# Altium PCB FEV-60_Motor_Driver.PcbDoc
Units mil, origin at the board's own origin, x right, y up, seen from the top; angles counter-clockwise.
Board outline 4025 x 5275 mil, 2 copper layers (Top Layer, Bottom Layer); 92 components, 68 nets, 395 pads, 95 vias.
Unrouted connection lines stored in the file: 2.
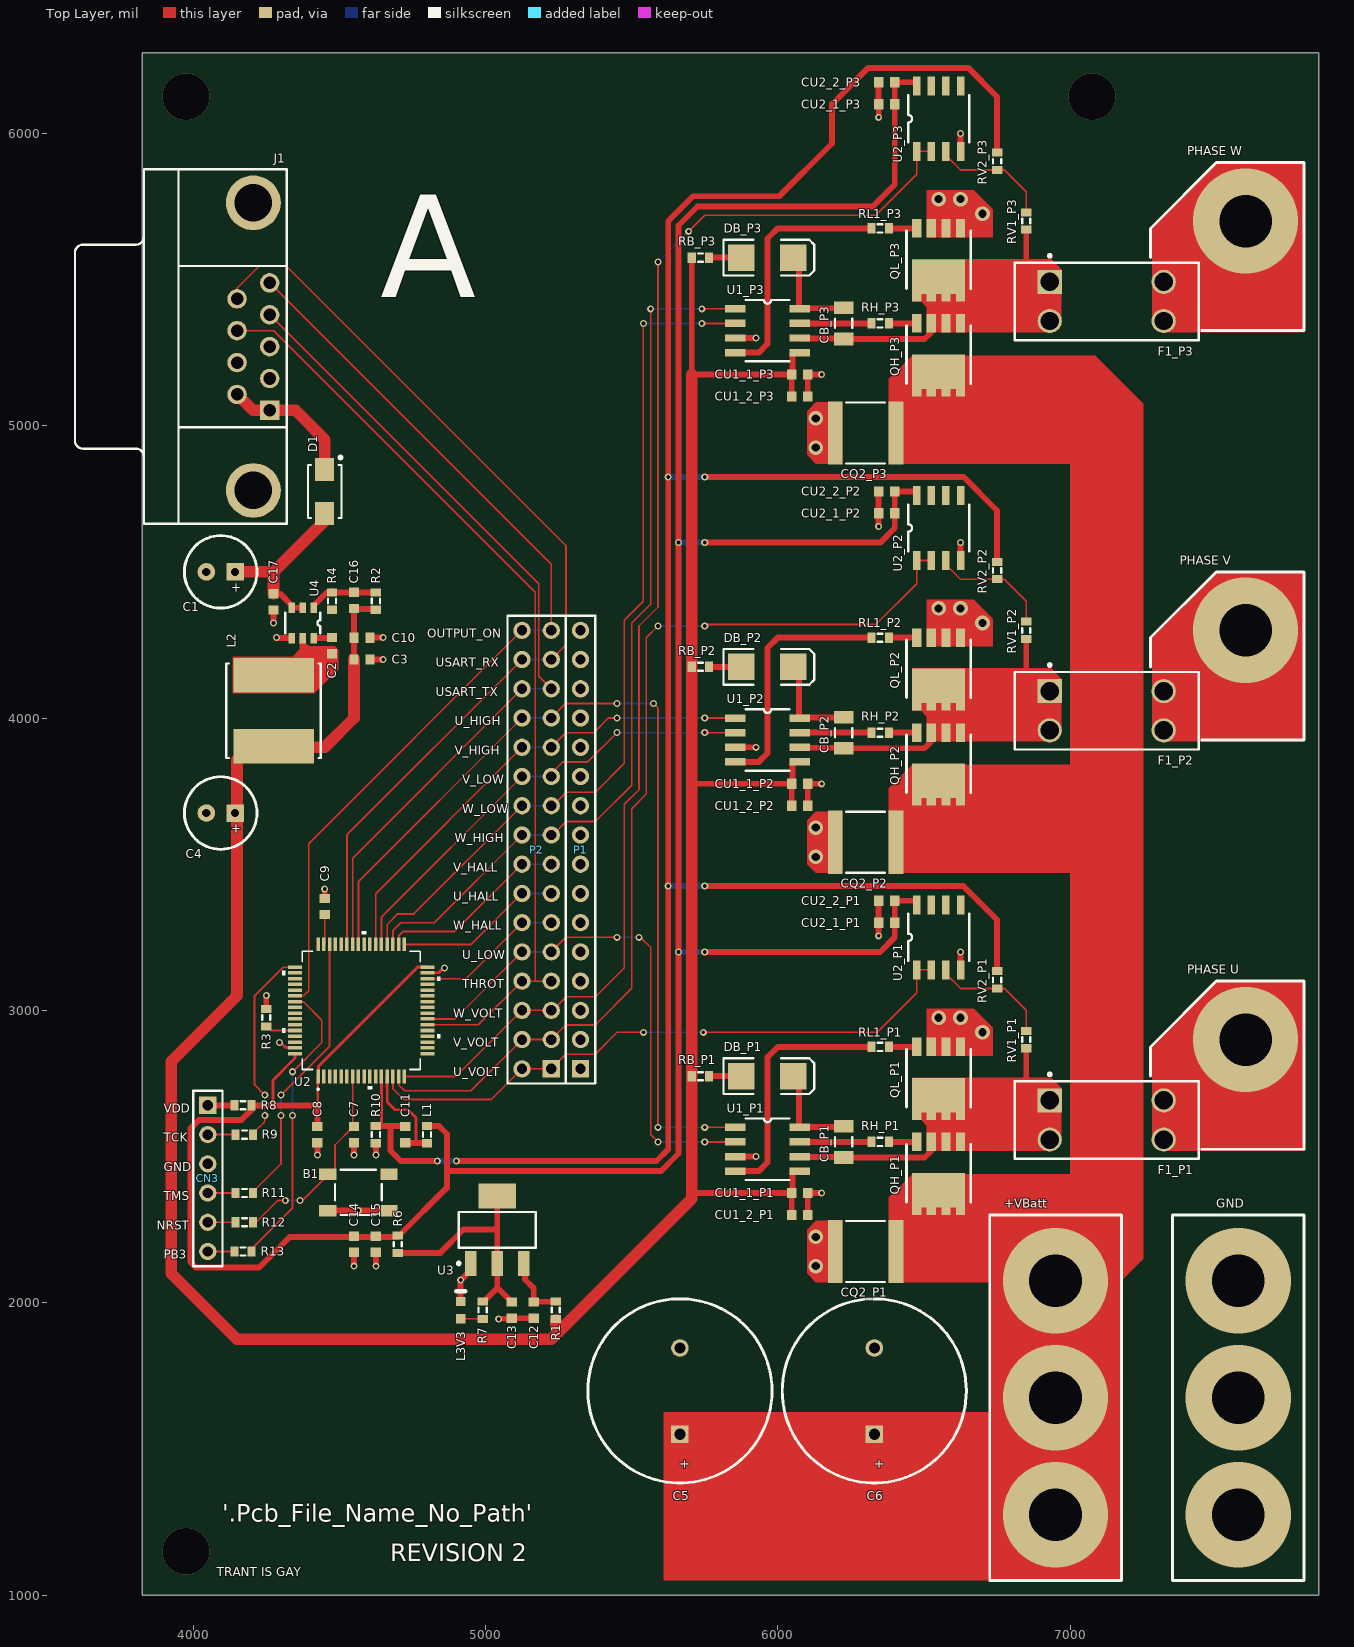
[diagram p0: Top Layer view]
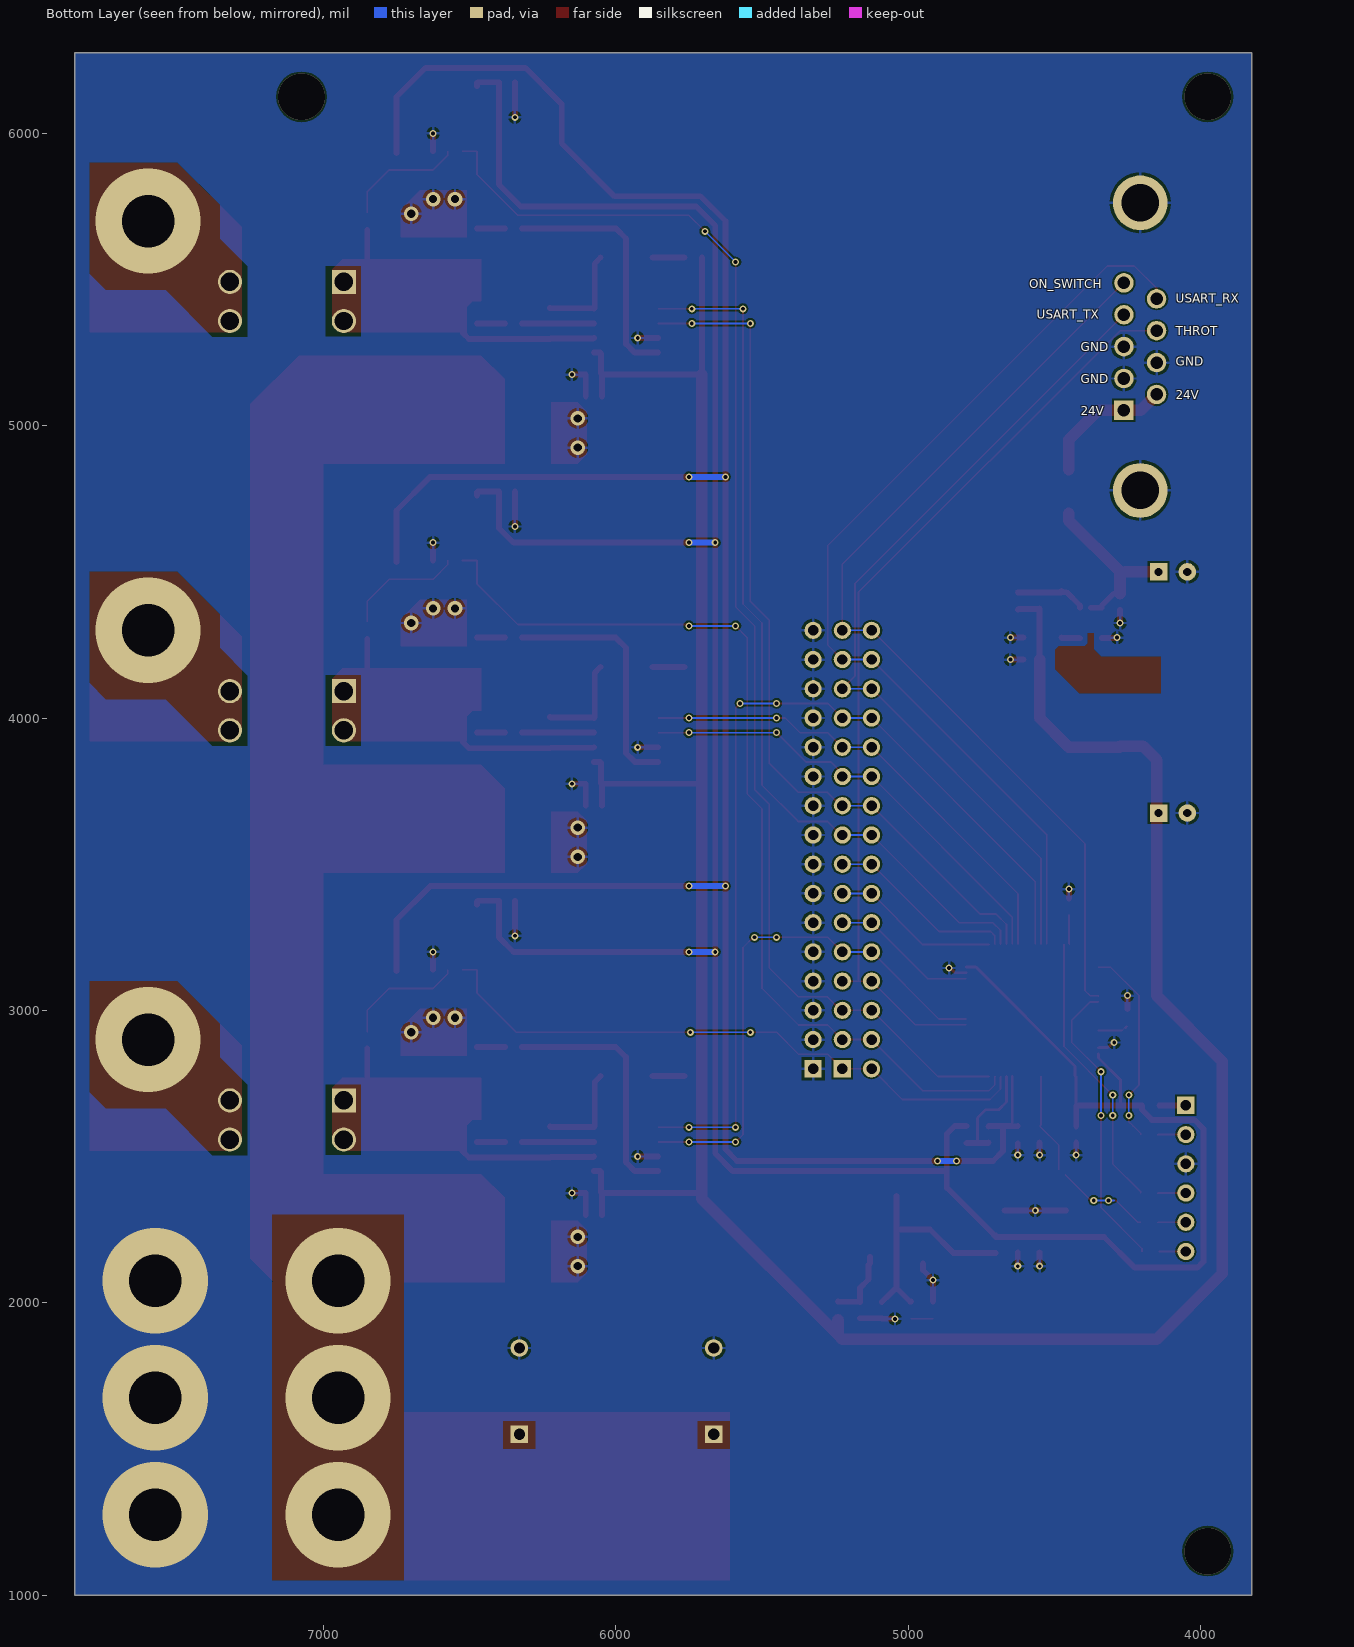
[diagram p1: Bottom Layer view, seen from below]

## Layer stack, top to bottom
Top Solder: solder mask 0.4, Solder Resist, Dk 3.5
Top Layer: signal copper 1.4
Dielectric 1: dielectric 12.6, FR-4, Dk 4.8
Bottom Layer: signal copper 1.4
Bottom Solder: solder mask 0.4, Solder Resist, Dk 3.5

## Board outline
3825,1000 7850,1000 7850,6275 3825,6275

## Design rules (kind name [scope] priority, off if disabled: settings)
Clearance Clearance_2 [All] p1: gap=6 ignorepadtopadclearanceinfootprint=FALSE
Clearance Clearance_1 [InNamedPolygon('Bottom Layer-GND')] p2: gap=10 ignorepadtopadclearanceinfootprint=FALSE except(0: Arc-Hole Track-Hole SMDPad-Hole THPad-Hole Via-Hole Fill-Hole Poly-Hole Region-Hole Text-Hole; 20: Via-Fill Via-Poly Via-Region)
Clearance [InNet('120V') vs InNet('GND')] p3: gap=6 ignorepadtopadclearanceinfootprint=FALSE except(200: Via-Poly)
ComponentClearance [All] p1: gap=6 collisioncheckmode=3 verticalgap=10 showdistances=FALSE
PlaneClearance PlaneClearance_1 [All] p1: clearance=20
PolygonConnect PolygonConnect_3 [All vs IsNamedPolygon('Bottom Layer-GND')] p1: connectstyle=Relief reliefconductorwidth=10 reliefentries=4 polygonreliefangle="90 Angle" airgapwidth=10
PolygonConnect PolygonConnect_2 [All vs IsNamedPolygon('Bottom Layer-GND')] p2: connectstyle=Relief reliefconductorwidth=25 reliefentries=4 polygonreliefangle="90 Angle" airgapwidth=10
PolygonConnect [All] p3: connectstyle=Relief reliefconductorwidth=10 reliefentries=4 polygonreliefangle="90 Angle" airgapwidth=10
RoutingVias [All] p1: holewidth=13 width=24 viastyle="Through Hole" minholewidth=13 minwidth=24 maxholewidth=28 maxwidth=50
SilkToSilkClearance [All] p1: silktosilkclearance=3
SilkToSolderMaskClearance [IsPad] p1: minsilkscreentomaskgap=5 clearancetoexposedcopper=TRUE
SolderMaskExpansion [All] p1: expansion=4
Width [All] p1: maxlimit=100 minlimit=6 preferedwidth=6
26 further rules are at their usual default settings.

## Classes and differential pairs
net class R4_Nets: FB GND
net class R2_Nets: 12V FB
net class L2_Nets: 12V NetC2_1
net class J1_Nets: 24V GND ON_SWITCH THROTTLE USART_RX USART_TX
net class C16_Nets: 12V FB
net class C10_Nets: 12V GND
net class C2_Nets: NetC2_1 NetC2_2
net class P1_Nets: GND
net class U2_Nets: AGND AVDD BOOT0 GND HALL1 HALL2 HALL3 HIN1 HIN2 HIN3 LIN1 LIN2 LIN3 NRST ON_SWITCH PB3 PF6 TCK THROTTLE TMS USART_RX USART_TX V_SENSE1 V_SENSE2 V_SENSE3 VDD
net class D1_Nets: 24V NetC1_1
net class C4_Nets: 12V GND
net class C3_Nets: 12V GND
net class C17_Nets: GND NetC1_1
net class C1_Nets: GND NetC1_1
net class U4_Nets: FB GND NetC1_1 NetC2_1 NetC2_2
net class R1_Nets: 12V NetC12_2
net class L3V3_Nets: GND NetL3V3_1
net class RV2_P3_Nets: AGND NetRV1_P3_1
net class RV2_P2_Nets: AGND NetRV1_P2_1
net class RV2_P1_Nets: AGND NetRV1_P1_1
net class RV1_P3_Nets: NetCB_P3_1 NetRV1_P3_1
net class RV1_P2_Nets: NetCB_P2_1 NetRV1_P2_1
net class RV1_P1_Nets: NetCB_P1_1 NetRV1_P1_1
net class RL1_P3_Nets: LO_P3 NetQL_P3_2
net class RL1_P2_Nets: LO_P2 NetQL_P2_2
net class RL1_P1_Nets: LO_P1 NetQL_P1_2
net class RH_P3_Nets: HO_P3 NetQH_P3_2
net class RH_P2_Nets: HO_P2 NetQH_P2_2
net class RH_P1_Nets: HO_P1 NetQH_P1_2
net class RB_P3_Nets: 12V NetDB_P3_1
net class RB_P2_Nets: 12V NetDB_P2_1
net class RB_P1_Nets: 12V NetDB_P1_1
net class QL_P3_Nets: GND NetCB_P3_1 NetQL_P3_2
net class QL_P2_Nets: GND NetCB_P2_1 NetQL_P2_2
net class QL_P1_Nets: GND NetCB_P1_1 NetQL_P1_2
net class QH_P3_Nets: 120V NetCB_P3_1 NetQH_P3_2
net class QH_P2_Nets: 120V NetCB_P2_1 NetQH_P2_2
net class QH_P1_Nets: 120V NetCB_P1_1 NetQH_P1_2
net class DB_P3_Nets: NetCB_P3_2 NetDB_P3_1
net class DB_P2_Nets: NetCB_P2_2 NetDB_P2_1
net class DB_P1_Nets: NetCB_P1_2 NetDB_P1_1
net class CU2_2_P3_Nets: GND VDD
net class CU2_1_P3_Nets: GND VDD
net class CU2_1_P2_Nets: GND VDD
net class CU2_1_P1_Nets: GND VDD
net class CU1_2_P3_Nets: 12V GND
net class CU1_2_P2_Nets: 12V GND
net class CU1_2_P1_Nets: 12V GND
net class CU1_1_P2_Nets: 12V GND
net class CU1_1_P1_Nets: 12V GND
net class CQ2_P3_Nets: 120V GND
net class CQ2_P2_Nets: 120V GND
net class C5_Nets: 120V GND
net class C6_Nets: 120V GND
net class CB_P3_Nets: NetCB_P3_1 NetCB_P3_2
net class CB_P2_Nets: NetCB_P2_1 NetCB_P2_2
net class CB_P1_Nets: NetCB_P1_1 NetCB_P1_2
net class V_SENSE[3..1]: V_SENSE1 V_SENSE2 V_SENSE3
net class U3_Nets: 3V3 GND NetC12_2
net class U2_P3_Nets: GND NetRV1_P3_1 V_SENSE3 VDD
net class U2_P2_Nets: GND NetRV1_P2_1 V_SENSE2 VDD
net class U2_P1_Nets: GND NetRV1_P1_1 V_SENSE1 VDD
net class R13_Nets: NetCN3_6 PB3
net class R12_Nets: NetCN3_5 NRST
net class R11_Nets: NetCN3_4 TMS
net class R10_Nets: AGND GND
net class R9_Nets: NetCN3_2 TCK
net class R8_Nets: NetCN3_1 VDD
net class R7_Nets: 3V3 NetL3V3_1
net class R6_Nets: 3V3 VDD
net class R3_Nets: BOOT0 GND
net class L1_Nets: AVDD VDD
net class F1_P3_Nets: NetCB_P3_1 NetF1_P3_3
net class F1_P2_Nets: NetCB_P2_1 NetF1_P2_3
net class F1_P1_Nets: NetCB_P1_1 NetF1_P1_3
net class CN3_Nets: GND NetCN3_1 NetCN3_2 NetCN3_4 NetCN3_5 NetCN3_6
net class C15_Nets: GND VDD
net class C14_Nets: GND VDD
net class C13_Nets: 3V3 GND
net class C12_Nets: GND NetC12_2
net class C11_Nets: AGND AVDD
net class C9_Nets: GND PF6
net class C8_Nets: GND VDD
net class C7_Nets: GND NRST
net class CU2_2_P2_Nets: GND VDD
net class CU2_2_P1_Nets: GND VDD
net class B1_Nets: GND NRST
component class U_FEV-60_Motor_Driver_Mcu: B1 C1 C2 C3 C4 C5 C6 C7 C8 C9 C10 C11 C12 C13 C14 C15 C16 C17 CN3 D1 J1 L1 L2 L3V3 P1 P2 R1 R2 R3 R4 R6 R7 R8 R9 R10 R11 R12 R13 U2 U3 U4
net class LIN[3..1]: LIN1 LIN2 LIN3
net class HIN[3..1]: HIN1 HIN2 HIN3
net class P2_Nets: HALL1 HALL2 HALL3 HIN1 HIN2 HIN3 LIN1 LIN2 LIN3 NetCN2_1 NetCN2_2 NetCN2_6 NetCN2_7 NetCN2_8 NetCN2_9 NetCN2_10 NetCN2_12 NetCN2_14 NetCN2_15 NetCN2_17 NetCN2_18 NetCN2_22 NetCN2_24 NetCN2_25 NetCN2_26 NetCN2_27 NetCN2_29 NetCN2_31 NetCN2_32 NetCN2_34 NetCN2_36 NetCN2_38 ON_SWITCH THROTTLE USART_RX USART_TX V_SENSE1 V_SENSE2 V_SENSE3
net class U1_P3_Nets: 12V GND HIN3 HO_P3 LIN3 LO_P3 NetCB_P3_1 NetCB_P3_2
net class U1_P2_Nets: 12V GND HIN2 HO_P2 LIN2 LO_P2 NetCB_P2_1 NetCB_P2_2
net class U1_P1_Nets: 12V GND HIN1 HO_P1 LIN1 LO_P1 NetCB_P1_1 NetCB_P1_2
net class CQ2_P1_Nets: 120V GND
net class CU1_1_P3_Nets: 12V GND
component class P3: CB_P3 CQ2_P3 CU1_1_P3 CU1_2_P3 CU2_1_P3 CU2_2_P3 DB_P3 F1_P3 QH_P3 QL_P3 RB_P3 RH_P3 RL1_P3 RV1_P3 RV2_P3 U1_P3 U2_P3
component class P2: CB_P2 CQ2_P2 CU1_1_P2 CU1_2_P2 CU2_1_P2 CU2_2_P2 DB_P2 F1_P2 QH_P2 QL_P2 RB_P2 RH_P2 RL1_P2 RV1_P2 RV2_P2 U1_P2 U2_P2
component class P1: CB_P1 CQ2_P1 CU1_1_P1 CU1_2_P1 CU2_1_P1 CU2_2_P1 DB_P1 F1_P1 QH_P1 QL_P1 RB_P1 RH_P1 RL1_P1 RV1_P1 RV2_P1 U1_P1 U2_P1
channel class FEV-60_Motor_Driver_Phase1: PHASE1 PHASE2 PHASE3

## Components (designator, comment, footprint, x,y, rotation, side; value= is the part's Value field where it differs from the comment)
B1 "Button" "Button - duplicate" 4670,2315 r180 top
C1 "UVY1V101MED1TD" UVY1V101MED1TD 4125,4500 r180 top value=100uF
C2 "Cap Semi" 1608[0603] 4475,4247.44 r90 top value=100nF
C3 "Cap Semi" 1608[0603] 4577.56,4200 r180 top value=10uF
C4 "UVY1V101MED1TD" UVY1V101MED1TD 4125,3675 r180 top value=100uF
C5 "UCS2D151MHD1TN" UCS2D151MHD1TN 5835,1700 r90 top value=100pF
C6 "UCS2D151MHD1TN" UCS2D151MHD1TN 6500,1700 r90 top value=100pF
C7 "Cap Semi" 1608[0603] 4550,2575 r90 top value=100nF
C8 "Cap Semi" 1608[0603] 4425,2575 r90 top value=22uF
C9 "Cap Semi" 1608[0603] 4450,3355 r270 top value=2.2uF
C10 "Cap Semi" 1608[0603] 4577.56,4275 r180 top value=10uF
C11 "Cap Semi" 1608[0603] 4725,2575 r270 top value=10uF
C12 "Cap Semi" 1608[0603] 5165,1974.45 r90 top value=10uF
C13 "Cap Semi" 1608[0603] 5090,1974.45 r90 top value=10uF
C14 "Cap Semi" 1608[0603] 4550,2200 r90 top value=22uF
C15 "Cap Semi" 1608[0603] 4625,2200 r90 top value=22uF
C16 "Cap Semi" 1608[0603] 4550,4402.56 r270 top value=12pF
C17 "Cap Semi" 1608[0603] 4275,4397.44 r90 top value=10uF
CB_P1 "Cap Semi" C1206 6225,2550 r90 top value=10uF (schematic designator CB)
CB_P2 "Cap Semi" C1206 6225,3950 r90 top value=10uF (schematic designator CB)
CB_P3 "Cap Semi" C1206 6225,5350 r90 top value=10uF (schematic designator CB)
CN3 "Header 6X1" HDR1X6 4050,2675 r270 top
CQ2_P1 "1uF" TDK-C5750-2_M 6300,2175 r180 top (schematic designator CQ2)
CQ2_P2 "1uF" TDK-C5750-2_M 6300,3575 r180 top (schematic designator CQ2)
CQ2_P3 "1uF" TDK-C5750-2_M 6300,4975 r180 top (schematic designator CQ2)
CU1_1_P1 "Cap Semi" 1608[0603] 6075,2375 r0 top value=10uF (schematic designator CU1_1)
CU1_1_P2 "Cap Semi" 1608[0603] 6075,3775 r0 top value=10uF (schematic designator CU1_1)
CU1_1_P3 "Cap Semi" 1608[0603] 6075,5175 r0 top value=10uF (schematic designator CU1_1)
CU1_2_P1 "Cap Semi" 1608[0603] 6075,2300 r0 top value=10uF (schematic designator CU1_2)
CU1_2_P2 "Cap Semi" 1608[0603] 6075,3700 r0 top value=10uF (schematic designator CU1_2)
CU1_2_P3 "Cap Semi" 1608[0603] 6075,5100 r0 top value=10uF (schematic designator CU1_2)
CU2_1_P1 "Cap Semi" 1608[0603] 6372.44,3300 r180 top value=10uF (schematic designator CU2_1)
CU2_1_P2 "Cap Semi" 1608[0603] 6372.44,4700 r180 top value=10uF (schematic designator CU2_1)
CU2_1_P3 "Cap Semi" 1608[0603] 6372.44,6100 r180 top value=10uF (schematic designator CU2_1)
CU2_2_P1 "Cap Semi" 1608[0603] 6372.44,3375 r180 top value=10uF (schematic designator CU2_2)
CU2_2_P2 "Cap Semi" 1608[0603] 6372.44,4775 r180 top value=10uF (schematic designator CU2_2)
CU2_2_P3 "Cap Semi" 1608[0603] 6372.44,6175 r180 top value=10uF (schematic designator CU2_2)
D1 "STPS2L30A" STPS2L30A 4450,4775 r270 top
DB_P1 "STPS2200U" SMB 5963.58,2775 r0 top (schematic designator DB)
DB_P2 "STPS2200U" SMB 5963.58,4175 r0 top (schematic designator DB)
DB_P3 "STPS2200U" SMB 5963.58,5575 r0 top (schematic designator DB)
F1_P1 "3568" KSTN-3568_V 7125,2625 r0 top (schematic designator F1)
F1_P2 "3568" KSTN-3568_V 7125,4025 r0 top (schematic designator F1)
F1_P3 "3568" KSTN-3568_V 7125,5425 r0 top (schematic designator F1)
J1 "D Connector 9" DSUB1.385-2H9 3831.89,5270.47 r90 top locked
L1 "Ferrite" J1-0603 4800,2575 r270 top
L2 "Inductor" 74404084100 4275,4025 r270 top value=6.8uH
L3V3 "HSMS-C190" AVAG-HSMX-C190_V 4915,1974.45 r90 top
P1 "Header 16" HDR1X16 5325,2800 r90 top locked
P2 "Header 16X2" HDR2X16 5225,2800 r90 top locked
QH_P1 "TPH2900ENH" TPH2900ENH 6625,2555 r270 top (schematic designator QH)
QH_P2 "TPH2900ENH" TPH2900ENH 6625,3955 r270 top (schematic designator QH)
QH_P3 "TPH2900ENH" TPH2900ENH 6625,5355 r270 top (schematic designator QH)
QL_P1 "TPH2900ENH" TPH2900ENH 6625,2880 r270 top (schematic designator QL)
QL_P2 "TPH2900ENH" TPH2900ENH 6625,4280 r270 top (schematic designator QL)
QL_P3 "TPH2900ENH" TPH2900ENH 6625,5680 r270 top (schematic designator QL)
R1 "Res3" J1-0603 5240,1974.45 r270 top value=0
R2 "Res3" J1-0603 4625,4400 r90 top value=422K
R3 "Res3" J1-0603 4250,2975 r270 top value=10K
R4 "Res3" J1-0603 4475,4400 r270 top value=30.1K
R6 "Res3" J1-0603 4700,2200 r270 top value=0
R7 "Res3" J1-0603 4990,1974.45 r90 top value=1K
R8 "Res3" J1-0603 4170.47,2675 r0 top value=0
R9 "Res3" J1-0603 4175,2575 r0 top value=22
R10 "Res3" J1-0603 4625,2575 r90 top value=0
R11 "Res3" J1-0603 4175,2375 r0 top value=22
R12 "Res3" J1-0603 4175,2275 r0 top value=22
R13 "Res3" J1-0603 4170.47,2175 r0 top value=22
RB_P1 "Res3" J1-0603 5735,2775 r0 top value=5 (schematic designator RB)
RB_P2 "Res3" J1-0603 5735,4175 r0 top value=5 (schematic designator RB)
RB_P3 "Res3" J1-0603 5735,5575 r0 top value=5 (schematic designator RB)
RH_P1 "Res3" J1-0603 6350,2550 r0 top value=5 (schematic designator RH)
RH_P2 "Res3" J1-0603 6350,3950 r0 top value=5 (schematic designator RH)
RH_P3 "Res3" J1-0603 6350,5350 r0 top value=5 (schematic designator RH)
RL1_P1 "Res3" J1-0603 6350,2875 r0 top value=5 (schematic designator RL1)
RL1_P2 "Res3" J1-0603 6350,4275 r0 top value=5 (schematic designator RL1)
RL1_P3 "Res3" J1-0603 6350,5675 r0 top value=5 (schematic designator RL1)
RV1_P1 "Res3" J1-0603 6850,2900 r270 top value=1Meg (schematic designator RV1)
RV1_P2 "Res3" J1-0603 6850,4300 r270 top value=1Meg (schematic designator RV1)
RV1_P3 "Res3" J1-0603 6850,5700 r270 top value=1Meg (schematic designator RV1)
RV2_P1 "Res3" J1-0603 6750,3104.53 r270 top value=22K (schematic designator RV2)
RV2_P2 "Res3" J1-0603 6750,4504.53 r270 top value=22K (schematic designator RV2)
RV2_P3 "Res3" J1-0603 6750,5904.53 r270 top value=22K (schematic designator RV2)
U1_P1 "FAN7191-F085" FAN7191-F085 5854.53,2600 r0 top (schematic designator U1)
U1_P2 "FAN7191-F085" FAN7191-F085 5854.53,4000 r0 top (schematic designator U1)
U1_P3 "FAN7191-F085" FAN7191-F085 5854.53,5400 r0 top (schematic designator U1)
U2 "MCU_LQFP64" "STM32F030R8 - duplicate" 4575,3000 r90 top
U2_P1 "TLV272IDR" D0008A_M 6550,3250 r90 top (schematic designator U2)
U2_P2 "TLV272IDR" D0008A_M 6550,4650 r90 top (schematic designator U2)
U2_P3 "TLV272IDR" D0008A_M 6550,6050 r90 top (schematic designator U2)
U3 "LD1117S33TR" "LD1117S33TR - duplicate" 5040,2249.45 r90 top
U4 "AP63301WU-7" AP63301WU-7 4375,4325 r270 top

## Footprints (in the part's own frame and the unit in brackets; to place one, negate y for a bottom-side part, rotate by r counter-clockwise, add the part's x,y. Pads: shape width x height; smd on the part's side, far side on the other; paste and mask are expansions set on the pad)
1608[0603] [mm] "Chip Capacitor, Body 1.6x0.8mm, IPC High Density"
  rect 0.8x0.9 smd: 1(-0.7,0) 2(0.7,0)
  body extent -0.87,-0.48 0.87,0.48, height 1.3
74404084100 [mm] "10µH Shielded Wirewound Inductor 3.3A 29mOhm Nonstandard"
  rect 3x7 smd: 1(-3.1,0) 2(3.1,0)
  silkscreen extent -4.1,-4.1 4.1,4.1, body extent -4.1,-4.1 4.1,4.1, height 4.2
AP63301WU-7 [mm] "Buck Switching Regulator IC Positive Adjustable 0.8V 1 Output 3A SOT-23-6 Thin, TSOT-23-6"
  rect 0.95x0.55 smd: 1(-1.325,0.95) 2(-1.325,0) 3(-1.325,-0.95) 4(1.325,-0.95) 5(1.325,0) 6(1.325,0.95)
  silkscreen extent -0.89,-1.52 0.89,1.52, body extent -1.4,-1.5 1.4,1.5, height 1.1
AVAG-HSMX-C190_V [mm] "SMD, 2-Leads, Body 1.6x0.8mm, Height 0.9mm"
  rect 0.8x0.8 smd: 1(-0.75,0) 2(0.75,0)
  silkscreen extent 1.65,-0.4 1.65,0.4, body extent -0.8,-0.4 0.8,0.4, height 0.9
"Button - duplicate" [mm]
  rect 1.5x1 smd: 1(0,0) 2(0,-3.175) 3(5.334,-3.175) 4(5.334,0)
  silkscreen extent 0.64,-3.56 4.7,0.38
C1206 [mm] "Chip Capacitor, Body 3.2x1.6mm, IPC High Density"
  rect 1.1x1.7 smd: 1(-1.35,0) 2(1.35,0)
  silkscreen extent -0.4,-0.75 0.4,0.75, body extent -1.7,-0.9 1.7,0.9, height 1.3
D0008A_M [mm] "SOIC, 8-Leads, Body 5x4mm, Pitch 1.27mm, IPC Low Density"
  rect 1.65x0.65 smd: 1(-2.825,1.905) 2(-2.825,0.635) 3(-2.825,-0.635) 4(-2.825,-1.905) 5(2.825,-1.905) 6(2.825,-0.635) 7(2.825,0.635) 8(2.825,1.905)
  silkscreen extent -2.03,-2.67 2.03,2.63, body extent -3,-2.45 3,2.45, height 1.63
DSUB1.385-2H9 [mm] "Connector; D Subminiature; 9 Position; Right Angle; Pitch 1.385 mm"
  rect 1.69x1.69 hole 1.09: 1(-5.54,-10.92)
  round 1.69 hole 1.09: 2(-2.77,-10.92) 3(0,-10.92) 4(2.77,-10.92) 5(5.54,-10.92) 6(-4.155,-8.08) 7(-1.385,-8.08) 8(1.385,-8.08) 9(4.155,-8.08)
  round 4.76 hole 3.26: 10(-12.495,-9.5) 11(12.495,-9.5)
  silkscreen extent -15.4,-12.4 15.4,6
FAN7191-F085 [mm]
  rect 1.75x0.65 smd: 1(0,0) 2(0,-1.27) 3(0,-2.54) 4(0,-3.81) 5(5.6,-3.81) 6(5.6,-2.54) 7(5.6,-1.27) 8(5.6,0)
  silkscreen extent 0.89,-4.57 4.7,0.76
HDR1X6 [mm] "Connector; Header; 6 Position"
  rect 1.5x1.5 hole 0.9: 1(0,0)
  round 1.5 hole 0.9: 2(2.54,0) 3(5.08,0) 4(7.62,0) 5(10.16,0) 6(12.7,0)
  silkscreen extent -1.27,-1.27 13.97,1.27
HDR1X16 [mm] "Connector; Header; 16 Position"
  rect 1.5x1.5 hole 0.9: 1(0,0)
  round 1.5 hole 0.9: 2(2.54,0) 3(5.08,0) 4(7.62,0) 5(10.16,0) 6(12.7,0) 7(15.24,0) 8(17.78,0) 9(20.32,0) 10(22.86,0) 11(25.4,0) 12(27.94,0) 13(30.48,0) 14(33.02,0) 15(35.56,0) 16(38.1,0)
  silkscreen extent -1.27,-1.27 39.37,1.27
HDR2X16 [mm] "Connector; Header; 16x2 Position"
  rect 1.5x1.5 hole 0.9: 1(0,0)
  round 1.5 hole 0.9: 2(0,2.54) 3(2.54,0) 4(2.54,2.54) 5(5.08,0) 6(5.08,2.54) 7(7.62,0) 8(7.62,2.54) 9(10.16,0) 10(10.16,2.54) 11(12.7,0) 12(12.7,2.54) 13(15.24,0) 14(15.24,2.54) 15(17.78,0) 16(17.78,2.54) 17(20.32,0) 18(20.32,2.54) 19(22.86,0) 20(22.86,2.54) 21(25.4,0) 22(25.4,2.54) 23(27.94,0) 24(27.94,2.54) 25(30.48,0) 26(30.48,2.54) 27(33.02,0) 28(33.02,2.54) 29(35.56,0) 30(35.56,2.54) 31(38.1,0) 32(38.1,2.54)
  silkscreen extent -1.27,-1.27 39.37,3.81
J1-0603 [mm] "Chip Resistor, Body 1.6x0.8mm, IPC High Density"
  rect 0.7x0.9 smd: 1(-0.75,0) 2(0.75,0)
  silkscreen extent -0.2,-0.35 0.2,0.35, body extent -0.85,-0.48 0.85,0.48, height 0.9
KSTN-3568_V [mm] "THD, 4-Leads, Body 16x6.73mm, Pitch 9.9mm"
  rect 2.1x2.1 hole 1.6: 1(-4.95,1.7)
  round 2.1 hole 1.6: 2(-4.95,-1.7) 3(4.95,1.7) 4(4.95,-1.7)
  silkscreen extent -8,-3.36 8,4.09, body extent -8,-3.37 8,3.37, height 7.44
"LD1117S33TR - duplicate" [mm] "SOT223, LDO 3.3V Converter"
  rect 2.15x1 smd: 1(-2.925,2.3) 2(-2.925,0) 3(-2.925,-2.3)
  rect 2.15x3.25 smd: 4(2.925,0)
  silkscreen extent -3.05,-3.35 1.55,3.47, body extent -3.5,-3.35 3.5,3.35, height 1.8
SMB [mm] "DO-214-AA/SMB; 2 C-Bend Leads; Body 5.3 x 3.6 mm, inc. leads (LxW)"
  rect 2.3x2.3 smd: 1(-2.25,0) 2(2.25,0)
  silkscreen extent -3.8,-1.55 4.1,1.55
"STM32F030R8 - duplicate" [mil]
  rect 47x12 smd: 1(-226.38,147.64) 2(-226.38,127.95) 3(-226.38,108.27) 4(-226.38,88.58) 5(-226.38,68.9) 6(-226.38,49.21) 7(-226.38,29.53) 8(-226.38,9.84) 9(-226.38,-9.84) 10(-226.38,-29.53) 11(-226.38,-49.21) 12(-226.38,-68.9) 13(-226.38,-88.58) 14(-226.38,-108.27) 15(-226.38,-127.95) 16(-226.38,-147.64) 33(226.38,-147.64) 34(226.38,-127.95) 35(226.38,-108.27) 36(226.38,-88.58) 37(226.38,-68.9) 38(226.38,-49.21) 39(226.38,-29.53) 40(226.38,-9.84) 41(226.38,9.84) 42(226.38,29.53) 43(226.38,49.21) 44(226.38,68.9) 45(226.38,88.58) 46(226.38,108.27) 47(226.38,127.95) 48(226.38,147.64)
  rect 12x47 smd: 17(-147.64,-226.38) 18(-127.95,-226.38) 19(-108.27,-226.38) 20(-88.58,-226.38) 21(-68.9,-226.38) 22(-49.21,-226.38) 23(-29.53,-226.38) 24(-9.84,-226.38) 25(9.84,-226.38) 26(29.53,-226.38) 27(49.21,-226.38) 28(68.9,-226.38) 29(88.58,-226.38) 30(108.27,-226.38) 31(127.95,-226.38) 32(147.64,-226.38) 49(147.64,226.38) 50(127.95,226.38) 51(108.27,226.38) 52(88.58,226.38) 53(68.9,226.38) 54(49.21,226.38) 55(29.53,226.38) 56(9.84,226.38) 57(-9.84,226.38) 58(-29.53,226.38) 59(-49.21,226.38) 60(-68.9,226.38) 61(-88.58,226.38) 62(-108.27,226.38) 63(-127.95,226.38) 64(-147.64,226.38)
  silkscreen extent -273,-270 270,270, body extent -236,-236 236,236, height 63
STPS2L30A [mm] "SODFL, Shottkey Diode"
  rect 2x1.65 smd: 1(-1.9,0) 2(1.9,0)
  silkscreen extent -3.07,-1.45 2.3,1.5, body extent -2.54,-1.45 2.54,1.45, height 2.45
TDK-C5750-2_M [mm] "SMD, 2-Leads, Body 6.1x5.4mm, IPC Low Density"
  rect 1.27x5.5 smd: 1(-2.644,0) 2(2.644,0)
  silkscreen extent -1.67,-2.65 1.67,2.65, body extent -3.05,-2.7 3.05,2.7, height 2.5
TPH2900ENH [mm]
  rect 3x4.61 smd: 1(4.318,-1.905)
  rect 1.6x0.8 smd: 1(5.673,-1.27) 1(5.673,0) 1(5.673,-3.81) 1(5.673,-2.54) 2(0.127,-3.81) 3(0.127,0) 3(0.127,-1.27) 3(0.127,-2.54)
  silkscreen extent 0.33,-4.7 5.33,0.89
UCS2D151MHD1TN [mil] "Radial Cap 50% Protection"
  rect 60x60 hole 38: 1(-150,170)
  round 60 hole 38: 2(145,170)
  silkscreen extent -316,-145 313,485
UVY1V101MED1TD [mil] "Radial Cap from Nichicon"
  rect 60x60 hole 28: 1(-18.43,0)
  round 60 hole 28: 2(80,0)
  silkscreen extent -93,-124 155,124

## Part data
C1 C4 C5 C6: "Polarized Capacitor (Axial)", LatestRevisionDate=17-Jul-2002, LatestRevisionNote="Re-released for DXP Platform.", PackageDescription="Polarized Capacitor; 2 Leads", PackageReference=POLAR0.8, Published=8-Jun-2000, Publisher="Altium Limited"
C2 C3 C7 C8 C9 C10 C11 C12 C13 C14 C15 C16 C17 CU1_1_P1 CU1_1_P2 CU1_1_P3 CU1_2_P1 CU1_2_P2 CU1_2_P3 CU2_1_P1 CU2_1_P2 CU2_1_P3 CU2_2_P1 CU2_2_P2 CU2_2_P3: "Capacitor (Semiconductor SIM Model)", LatestRevisionDate=29-May-2009, LatestRevisionNote="IPC-7351 Footprint Added.", PackageDescription="Chip Capacitor", PackageReference=C1206, Published=8-Jun-2000, Publisher="Altium Limited"
CB_P1 CB_P2 CB_P3: "Capacitor (Semiconductor SIM Model) at least 10-20uF", LatestRevisionDate=29-May-2009, LatestRevisionNote="IPC-7351 Footprint Added.", PackageDescription="Chip Capacitor", PackageReference=C1206, Published=8-Jun-2000, Publisher="Altium Limited"
CN3: "Header, 6-Pin, Single row", LatestRevisionDate=17-Jul-2002, LatestRevisionNote="Re-released for DXP Platform.", Publisher="Altium Limited"
CQ2_P1 CQ2_P2 CQ2_P3: library part C5750X7R2E105K230KA, "Chip Capacitor, 1 uF, +/- 20%, 250 V, -55 to 125 degC, 2220 (5750 Metric), RoHS, Tape and Reel", Capacitance=10µF, Manufacturer=TDK, Operating Temperature=-55°C~125°C, Package / Case=2220(5750Metric), Package Description="SMD, 2-Leads, Body 6.1 x 5.4 mm", Package Reference=C5750-2, PCN Part Number=MLCCPartNumberChange30/Nov/2012, Ratings=-, Standard Package=1, Temperature Coefficient=X7S, Tolerance=±20%, Voltage - Rated=100V, Applications=GeneralPurpose, Catalog Drawings=CSERIES_2220_2.5, Category=Capacitors, Datasheet URL=https://datasheet.ciiva.com/24216/c5750x7s2a106m230kb-265716-24216594.pdf, Datasheet Version=09/2013, Family=CeramicCapacitors, Featured Product=Compact,High-CapacitanceMultilayerCeramicChipCapacitorsMidVoltageX7S-100VMLCCsC-SeriesMidVoltageMLCCs, Features=-, Height - Seated (Max)=-, Kits=445-9009-KIT-ND-KITCAPCERHICAP100V-630VSMDSAMPLEKIT1008-ND-KITCAPCERMLCC100V-630V, Lead Spacing=-, Lead Style=-, Manufacturer URL=http://www.tdk.com/, Mounting Technology=SurfaceMount, Mounting Type=SurfaceMount,MLCC, Online Catalog=CSeries,MidVoltage, Other Names=445-5212-1, Packaging=CutTape(CT), Product Training Modules=SEAT,CCV,andTVCLDesignToolsCSeriesMidVoltageCapacitorsFamilyGuidetoReplacinganElectrolyticCapacitorwithanMLCC, RoHS Information=RoHSCertificate-MLCC, Series=C, Size / Dimension="0.224\"Lx0.197\"W(5.70mmx5.00mm)", Thickness (Max)="0.098\"(2.50mm)"
D1: Manuf_1=STM, Manuf_Part_1=BAT60JFILM, Distrib=ST, ECCN_US/EU=EAR99/NEC, Order=BAT60JFILM, Provided=ST, Revision="July-2002: Re-released for DXP Platform."
DB_P1 DB_P2 DB_P3: library part "D Schottky", "Schottky Diode", Code_JEDEC=DO-214-AA, LatestRevisionDate=17-Jul-2002, LatestRevisionNote="Re-released for DXP Platform.", PackageDescription="DO-214-AA/SMB; 2 C-Bend Leads; Body 5.3 x 3.6 mm, inc. leads (LxW)", PackageReference=SMB, Published=8-Jun-2000, Publisher="Altium Limited"
F1_P1 F1_P2 F1_P3: library part CMP-2000-05464-1, "Fuse Holder, 20 A, 500 V, -50 to 145 degC, 4-Pin THD, RoHS", Manufacturer=Keystone, Package Description="4-Pin Through Hole Device, Body 16 x 6.73 mm, Pitch 9.9 mm", Datasheet URL=https://datasheet.ciiva.com/16294/m60-2p40-16294706.pdf, Datasheet Version=04/2013, Manufacturer URL=http://www.keyelco.com/, Mounting Technology=ThroughHole, Package Reference=3568
J1: "Receptacle Assembly, 9 Position, Right Angle", PackageDocument=O, DatasheetDocument=1-Sep-1999, Gender=Receptacle, LatestRevisionDate=17-Jul-2002, LatestRevisionNote="Re-released for DXP Platform.", Orientation="Right Angle", PackageReference=788750, Positions=9, Published=15-Jun-2001, Publisher="Altium Limited"
L1: library part Res3, "Resistor", LatestRevisionDate=29-May-2009, LatestRevisionNote="IPC-7351 Footprint Added.", PackageDescription="Chip Resistor", PackageReference=J1-0603, Published=8-Jun-2000, Publisher="Altium Limited"
L3V3: library part CMP-2000-06427-1, "LED Uni-Color Red, 52 mW, 20 mA, -40 to 85 degC, 2-Pin SMD, RoHS, Tape and Reel", Emitting Color=Red, Forward Current=25mA, Forward Voltage=2.6V, Manufacturer=Avago, Operating Temperature Classification=Industrial, Operating Temp Range=-40Cto85C, Package Description="2-Pin Surface Mount Device, Body 1.6 x 0.8 mm, Height 0.9 mm", Package Reference=HSMX-C190, Package Type=ChipLed, Power Dissipation=52W, Reverse Voltage=5V, Test Current (It)=20mA, Chip Material=GaP, Datasheet URL=http://docs.avagotech.com/docs/AV02-0551EN, Datasheet Version=03/2012, DELETED=Compliant, Dominant Wave Length=626nm, High Brightness=No, Lens Dimensions=1x0.8x0.5mm, Lens Type=ColorlessDiffused, Luminous Intensity=10mcd, Lum Intensity=10mcd, Main Category=ChipLED, Manufacturer URL=http://www.avagotech.com/, Mounting=SurfaceMount, Mounting Technology=SurfaceMount, Number of  Elements=1, Packaging=TapeandReel, Peak Wavelength=630nm, Pin Count=2, Product Depth (mm)=0.8mm, Product Height (mm)=0.8mm, Product Length (mm)=1.6mm, Rad Hardened=No, Shape Type=Rectangular, Type=Uni-Color, Viewing Angle=170deg
P1: "Header, 16-Pin", LatestRevisionDate=17-Jul-2002, LatestRevisionNote="Re-released for DXP Platform.", Publisher="Altium Limited"
P2: "Header, 16-Pin, Dual row", LatestRevisionDate=17-Jul-2002, LatestRevisionNote="Re-released for DXP Platform.", Publisher="Altium Limited"
QH_P1 QH_P2 QH_P3 QL_P1 QL_P2 QL_P3: "N-Channel 200V 33A (Ta) 78W (Tc) Surface Mount 8-SOP Advance (5x5)", Manufacturer=Toshiba, Part Number=TPH2900ENHL1QCT-ND, ComponentLink1Description=TPH2900ENH, ComponentLink1URL=https://www.digikey.com/product-detail/en/toshiba-semiconductor-and-storage/TPH2900ENHL1Q/TPH2900ENHL1QCT-ND/5456291
R1 R2 R3 R4 R6 R7 R8 R9 R10 R11 R12 R13 RB_P1 RB_P2 RB_P3 RH_P1 RH_P2 RH_P3 RL1_P1 RL1_P2 RL1_P3 RV1_P1 RV1_P2 RV1_P3 RV2_P1 RV2_P2 RV2_P3: "Resistor", LatestRevisionDate=29-May-2009, LatestRevisionNote="IPC-7351 Footprint Added.", PackageDescription="Chip Resistor", PackageReference=J1-0603, Published=8-Jun-2000, Publisher="Altium Limited"
U1_P1 U1_P2 U1_P3: "600 V / 4.5 A, High and Low / Side Automotive Gate / Driver IC", Manufacturer="On Semiconductor", ComponentLink1Description=Datasheet, ComponentLink1URL=https://www.onsemi.com/pub/Collateral/FAN7191_F085-D.PDF, Part Number=FAN7191-F085
U2_P1 U2_P2 U2_P3: library part CMP-0272-02013-3, "550 uA/Ch, 3 MHz, Rail-to-Rail Output Operational Amplifier, 2.7 to 16 V, -40 to 125 degC, 8-pin SOIC (D8), Green (RoHS & no Sb/Br)", Manufacturer="Texas Instruments", Rating=Catalog, Total Supply Voltage(Max)(+5V is 5, +/-5V is 10)=16, Total Supply Voltage(Min)(+5V is 5, +/-5V is 10)=2.7, CMRR(Min)(dB)=58, Code_JEDEC=MS-012, ComponentLink1Description="Manufacturer URL", ComponentLink1URL=http://www.ti.com/, ComponentLink2Description=Datasheet, ComponentLink2URL=http://www.ti.com/lit/ds/symlink/tlv272.pdf, ComponentLink3Description="Package Specification", ComponentLink3URL=http://www.ti.com/litv/pdf/msoi002j, DatasheetVersion=SLOS351D, Eco-Plan="Green (RoHS & no Sb/Br)", GBW(Typ)(MHz)=2.4, IIB(Max)(pA)=60, Iq per channel(Max)(mA)=0.56, Mounting Technology="Surface Mount", Number of Channels=2, Offset Drift(Typ)(uV/C)=2, PackageDescription="8-Pin Plastic Small Outline, Body 4.9 x 3.9 mm, Pitch 1.27 mm", PackageReference=D0008A, PackageVersion="4040047-3/M, 06/2011", Packing="LARGE T&R", PartNumber=TLV272IDR, Slew Rate(Typ)(V/us)=2.1, Sub Family="Low Supply Voltage Amplifier (<=2.7V), Precision Amplifier", Vio (25C)(Max)(mV)=5
U4: "Buck Switching Regulator IC Positive Adjustable 0.8V 1 Output 3A SOT-23-6 Thin, TSOT-23-6", ComponentLink1Description=Digikey, ComponentLink1URL=https://www.digikey.com/product-detail/en/diodes-incorporated/AP63301WU-7/31-AP63301WU-7CT-ND/10492238
L2: Code_IEC=1005, Code_JEITA=0402, LatestRevisionDate=29-May-2009, LatestRevisionNote="IPC-7351 Footprint Added.", PackageDescription="Chip Inductor", PackageReference=0402-A, Published=8-Jun-2000, Publisher="Altium Limited"

## Via types
v1: diameter 24, hole 13, Top Layer to Bottom Layer, 68 vias
v2: diameter 50, hole 28, Top Layer to Bottom Layer, 15 vias
v3: diameter 360, hole 180, Top Layer to Bottom Layer, 9 vias
v4: diameter 160, hole 160, Top Layer to Bottom Layer, 3 vias

## Nets (pads, with @x,y where several pads share a name; then routed paths per layer and width w, separated by ;. In a path a pad name is that pad's centre, name@x,y a point inside that pad or via, vN(x,y) a via of type N, cw(c..) or ccw(c..) an arc to the next point about the centre after c; other vN are vias at no path point)
3V3: C13.2 R6.2 R7.2 U3.2 U3.4 | length 827.3
  Top Layer w20: R6.2 4845.47,2170.47 4925,2250 5040,2250 ; R7.2 4993.94,2003.98 5040,2050.04 ; U3.4 5040,2250 ; C13.2 5065,2027.01 5040.98,2051.02 5040,2050.04 ; 5040,2050.04 U3.2 5040,2250
12V: C3.2 C4.1 C10.2 C16.2 CU1_1_P1.1 CU1_1_P2.1 CU1_1_P3.1 CU1_2_P1.1 CU1_2_P2.1 CU1_2_P3.1 L2.2 R1.2 R2.1 RB_P1.1 RB_P2.1 RB_P3.1 U1_P1.5 U1_P2.5 U1_P3.5 | length 9667.5
  Top Layer w20: C3.2 C10.2 C16.2 4552.26,4372.74 4622.74,4372.74 R2.1 ; 5705.47,3775 CU1_1_P2.1 ; RB_P3.1 5705.47,5175 CU1_1_P3.1 ; 5715.24,2375 5705.47,2375 CU1_1_P1.1 ; CU1_2_P1.1 CU1_1_P1.1 ; CU1_2_P2.1 CU1_1_P2.1 ; CU1_2_P3.1 CU1_1_P3.1 ; U1_P1.5 6053.35,2450 6050.55,2447.2 6050.55,2378.11 CU1_1_P1.1 ; U1_P2.5 6053.35,3850 6050.55,3847.2 6050.55,3778.11 CU1_1_P2.1 ; U1_P3.5 6053.35,5250 6050.55,5247.2 6050.55,5178.11 CU1_1_P3.1
  Top Layer w40: C4.1 4150,3681.57 4150,3856.69 4196.26,3902.95 L2.2 4277.95,3900 4450,3900 4550,4000 C3.2 ; C4.1@4150,3675 4150,3050 3925,2825 3925,2100 4150,1875 5225,1875 5240,1890 ; R1.2@5240,1940.98 5240,1890 ; 5705.47,5175 RB_P2.1 5705.47,3775 5705.47,3700 RB_P1.1 5705.47,2375 5705.47,2355.47 5240,1890
24V: D1.1 J1.1 J1.6 | length 466.6
  Top Layer w40: J1.6 4204.53,5052.36 J1.1 4350,5052.36 4450,4952.36 D1.1
120V: C5.1 C6.1 CQ2_P1.1 CQ2_P2.1 CQ2_P3.1 QH_P1.1 QH_P2.1 QH_P3.1
  other v3: 6950,1275 6950,1675 6950,2075
AGND: C11.1 R10.2 RV2_P1.1 RV2_P2.1 RV2_P3.1 U2.12 | length 8852
  Top Layer w10: 4643.7,2604.53 4643.9,2604.72 U2.12
  Top Layer w20: R10.2 4625.98,2603.54 4643.7,2603.54 ; 4643.7,2604.53 4675,2604.53 ; C11.1 4723.03,2604.53 4675,2604.53 ; v1(4835,2485) 4710,2485 4675,2520 4675,2604.53 ; v1(4900,2485) 5585,2485 5625,2525 v1(5625,3425) v1(5625,4825) ; v1@5625,4835 5625,5700 5710,5785 6005,5785 6185,5965 6185,6100 6309.06,6224.06 6650.94,6224.06 6750,6125 RV2_P3.1 RV2_P3.1@6750,5933.11 ; v1(5750,3425) 6634.78,3425 6750,3309.78 RV2_P1.1 ; v1(5750,4825) 6634.78,4825 6750,4709.78 RV2_P2.1
  Bottom Layer w20: v1(4835,2485) v1(4900,2485) ; v1(5625,3425) v1(5750,3425) ; v1(5625,4825) v1(5750,4825)
AVDD: C11.2 L1.2 U2.13 | length 370.2
  Top Layer w10: 4663.58,2735.12 U2.13 ; 4663.9,2735.12 4663.9,2686.1 4690,2660 4735,2660 4762.5,2632.5 4762.5,2546.46
  Top Layer w20: C11.2 4725.98,2546.46 4762.5,2546.46 4799.02,2546.46 L1.2
BOOT0: R3.2 U2.60 | length 113.2
  Top Layer w6: R3.2@4256.1,2939.37 R3.2 4253.94,2945.47 4268.31,2931.1 U2.60
FB: C16.1 R2.2 R4.1 U4.1 | length 241.3
  Top Layer w20: U4.1 4412.4,4385.04 4457.64,4430.28 4471.22,4430.28 R4.1@4475,4434.06 ; R4.1 4475.3,4429.82 4549.7,4429.82 C16.1 4550.3,4429.82 4624.7,4429.82 R2.2
GND: B1.1 B1.4 C1.2 C3.1 C4.2 C5.2 C6.2 C7.1 C8.1 C9.1 C10.1 C12.1 C13.1 C14.1 C15.1 C17.1 CN3.3 CQ2_P1.2 CQ2_P2.2 CQ2_P3.2 CU1_1_P1.2 CU1_1_P2.2 CU1_1_P3.2 CU1_2_P1.2 CU1_2_P2.2 CU1_2_P3.2 CU2_1_P1.2 CU2_1_P2.2 CU2_1_P3.2 CU2_2_P1.2 CU2_2_P2.2 CU2_2_P3.2 J1.2 J1.3 J1.7 J1.10 J1.11 L3V3.2 P1.1 P1.2 P1.3 P1.4 P1.5 P1.6 P1.7 P1.8 P1.9 P1.10 P1.11 P1.12 P1.13 P1.14 P1.15 P1.16 QL_P1.3 QL_P2.3 QL_P3.3 R3.1 R4.2 R10.1 U1_P1.3 U1_P2.3 U1_P3.3 U2.31 U2.63 U2_P1.4 U2_P2.4 U2_P3.4 U3.1 U4.4 | length 2211.6
  Top Layer w10: v1(4295,2890) 4298.79,2890 4315.74,2873.05 4347.62,2873.05 U2.63 ; U2.31 4802.09,3128.67 4839.88,3128.67 4856.21,3145 v1(4860,3145)
  Top Layer w20: R3.1 v1(4250,3050.47) ; v1(4275,4325) C17.1 ; v1(4285,4275) 4285.77,4274.23 4336.77,4274.23 4337.6,4273.41 U4.4 ; v1(4425,2505) C8.1 ; C9.1 v1(4450,3415) ; B1.4 v1(4565,2315) B1.1 ; v1(4550,2125) C14.1 ; v1(4550,2505) C7.1 ; C3.1 v1(4650,4200) ; C10.1 v1(4650,4275) ; v1(4625,2125) C15.1 ; v1(4625,2505) R10.1 ; L3V3.2 v1(4915,2077.2) 4949.45,2111.65 U3.1 ; v1(5045,1944.45) 5045.77,1945.21 5088.32,1945.21 C13.1 C12.1 ; U1_P1.3 v1(5925,2500) ; U1_P2.3 v1(5925,3900) ; U1_P3.3 v1(5925,5300) ; CU1_2_P1.2 CU1_1_P1.2 v1(6150,2375) ; CU1_2_P2.2 CU1_1_P2.2 v1(6150,3775) ; CU1_2_P3.2 CU1_1_P3.2 v1(6150,5175) ; v1(6344.94,3255.06) CU2_1_P1.2 CU2_2_P1.2 ; v1(6344.94,4655.06) CU2_1_P2.2 CU2_2_P2.2 ; CU2_2_P3.2 CU2_1_P3.2 6344.94,6099.94 6344.94,6055.06 v1(6345,6055) ; U2_P1.4 v1(6625,3200) ; U2_P2.4 v1(6625,4600) ; U2_P3.4 v1(6625,6000)
  other v2: 6130,2125 6130,2225 6700,2925 6550,2975 6625,2975 6130,3525 6130,3625 6700,4325 6550,4375 6625,4375 6130,4925 6130,5025 6700,5725 6550,5775 6625,5775
  other v3: 7575,1275 7575,1675 7575,2075
HALL1: P2.13 P2.14 U2.33 | length 575.4
  Top Layer w6: U2.33 4724.02,3225 4950,3225 P2.14
  Bottom Layer w6: P2.14 P2.13
HALL2: P2.15 P2.16 U2.34 | length 651.9
  Top Layer w6: U2.34 4703.64,3227.06 4703.64,3255.26 4718.38,3270 4895,3270 P2.16
  Bottom Layer w6: P2.16 P2.15
HALL3: P2.11 P2.12 U2.30 | length 503
  Top Layer w6: U2.30 4933.27,3108.27 P2.12
  Bottom Layer w6: P2.12 P2.11
HIN1: P2.25 P2.26 U1_P1.1 U2.41 | length 3197
  Top Layer w6: U2.41 4565.16,3440.16 P2.26 ; P2.25 5275,4050 v1(5450,4050) ; v1(5575,4050) 5590,4035 v1(5590,2600) ; v1(5750,2600) U1_P1.1
  Bottom Layer w6: P2.26 P2.25 ; v1(5450,4050) v1(5575,4050) ; v1(5590,2600) v1(5750,2600)
HIN2: P2.23 P2.24 U1_P2.1 U2.38 | length 1652
  Top Layer w6: U2.38 4624.21,3399.21 P2.24 ; P2.23 5275,3950 5370,3950 5420,4000 v1(5450,4000) ; v1(5750,4000) U1_P2.1
  Bottom Layer w6: P2.24 P2.23 ; v1(5450,4000) v1(5750,4000)
HIN3: P2.17 P2.18 U1_P3.1 U2.35 | length 3015.8
  Top Layer w6: U2.35 4683.95,3227.06 4683.95,3273.95 4710,3300 4825,3300 P2.18 ; P2.17 5230,3600 5276.27,3646.27 5376.27,3646.27 5500,3770 5500,4325 5565,4390 v1(5565,5400) ; v1(5740,5400) U1_P3.1
  Bottom Layer w6: P2.18 P2.17 ; v1(5565,5400) v1(5740,5400)
HO_P1: RH_P1.1 U1_P1.7 | length 245.5
  Top Layer w20: U1_P1.7 RH_P1.1
HO_P2: RH_P2.1 U1_P2.7 | length 245.5
  Top Layer w20: U1_P2.7 RH_P2.1
HO_P3: RH_P3.1 U1_P3.7 | length 245.5
  Top Layer w20: U1_P3.7 RH_P3.1
LIN1: P2.9 P2.10 U1_P1.2 U2.23 | length 1833.8
  Top Layer w6: U2.23 4895.47,2970.47 P2.10 ; P2.9 5275,3250 v1(5450,3250) ; v1(5525,3250) 5530,3250 5565,3215 5565,2575 v1(5590,2550) ; v1(5750,2550) U1_P1.2
  Bottom Layer w6: P2.10 P2.9 ; v1(5450,3250) v1(5525,3250) ; v1(5590,2550) v1(5750,2550)
LIN2: P2.21 P2.22 U1_P2.2 U2.37 | length 1570.4
  Top Layer w6: U2.37 4643.9,3318.9 P2.22 ; P2.21 5225,3810 5265,3850 5350,3850 v1(5450,3950) ; v1(5750,3950) U1_P2.2
  Bottom Layer w6: P2.22 P2.21 ; v1(5450,3950) v1(5750,3950)
LIN3: P2.19 P2.20 U1_P3.2 U2.36 | length 2948.5
  Top Layer w6: U2.36 4663.58,3293.58 4700,3330 4755,3330 P2.20 ; P2.19 5230,3700 5276.27,3746.27 5376.27,3746.27 5475,3845 5475,4335 5540,4400 v1(5540,5350) ; v1@5745,5350 U1_P3.2
  Bottom Layer w6: P2.20 P2.19 ; v1(5540,5350) v1(5740,5350)
LO_P1: RL1_P1.1 U1_P1.4 | length 852.9
  Top Layer w20: U1_P1.4 5935,2450 5965,2480 5965,2840 6000,2875 RL1_P1.1
LO_P2: RL1_P2.1 U1_P2.4 | length 852.9
  Top Layer w20: U1_P2.4 5935,3850 5965,3880 5965,4240 6000,4275 RL1_P2.1
LO_P3: RL1_P3.1 U1_P3.4 | length 852.9
  Top Layer w20: U1_P3.4 5935,5250 5965,5280 5965,5640 6000,5675 RL1_P3.1
NetC1_1: C1.1 C17.2 D1.2 U4.2 U4.3 | length 585.4
  Top Layer w20: C17.2 4297.64,4425 4337.6,4385.04 U4.3 U4.2
  Top Layer w40: C1.1 4256.69,4500 ; C17.2 4275,4500 4450,4675 D1.2
NetC2_1: C2.1 L2.1 U4.5
NetC2_2: C2.2 U4.6 | length 63.6
  Top Layer w20: U4.6 4412.4,4273.09 4413.23,4273.92 4473.92,4273.92 C2.2
NetC12_2: C12.2 R1.1 U3.3 | length 245
  Top Layer w20: U3.3@5130.55,2156.93 U3.3 5135.28,2129.57 5135.28,2079.17 5165,2049.45 C12.2 5165.98,2002.99 5239.02,2002.99 R1.1
NetCB_P1_1: CB_P1.1 F1_P1.1 F1_P1.2 QH_P1.3 QL_P1.1 RV1_P1.2 U1_P1.6 | length 1166.9
  Top Layer w20: U1_P1.6 6076.57,2498.43 6223.43,2498.43 CB_P1.1 6501.85,2496.85 6525,2520 6525,2550 QL_P1.1@6525,2656.65 ; QL_P1.1@6625,2656.65 6628.94,2660.59 6898.78,2660.59 F1_P1.1 ; RV1_P1.2 6850,2750 6908.07,2691.93 F1_P1.1 ; F1_P1.1@6955.12,2691.93 F1_P1.1
NetCB_P1_2: CB_P1.2 DB_P1.2 U1_P1.8 | length 335.8
  Top Layer w20: DB_P1.2 6072.2,2754.96 6072.2,2602.8 U1_P1.8 6076.57,2601.57 6223.43,2601.57 CB_P1.2
NetCB_P2_1: CB_P2.1 F1_P2.1 F1_P2.2 QH_P2.3 QL_P2.1 RV1_P2.2 U1_P2.6 | length 1187.4
  Top Layer w20: U1_P2.6 6076.57,3898.43 6223.43,3898.43 CB_P2.1 6501.85,3896.85 6525,3920 6525,3950 QL_P2.1@6525,4056.65 ; QL_P2.1@6625,4056.65 6628.94,4060.59 6898.78,4060.59 F1_P2.1 ; RV1_P2.2 6850,4115 6873.07,4091.93 F1_P2.1 ; F1_P2.1@6955.12,4091.93 F1_P2.1
NetCB_P2_2: CB_P2.2 DB_P2.2 U1_P2.8 | length 335.8
  Top Layer w20: DB_P2.2 6072.2,4154.96 6072.2,4002.8 U1_P2.8 6076.57,4001.57 6223.43,4001.57 CB_P2.2
NetCB_P3_1: CB_P3.1 F1_P3.1 F1_P3.2 QH_P3.3 QL_P3.1 RV1_P3.2 U1_P3.6 | length 1166.9
  Top Layer w20: U1_P3.6 6076.57,5298.43 6223.43,5298.43 CB_P3.1 6501.85,5296.85 6525,5320 6525,5350 QL_P3.1@6525,5456.65 ; QL_P3.1@6625,5456.65 6628.94,5460.59 6898.78,5460.59 F1_P3.1 ; RV1_P3.2 6850,5550 6908.07,5491.93 F1_P3.1 ; F1_P3.1@6955.12,5491.93 F1_P3.1
NetCB_P3_2: CB_P3.2 DB_P3.2 U1_P3.8 | length 335.8
  Top Layer w20: DB_P3.2 6072.2,5554.96 6072.2,5402.8 U1_P3.8 6076.57,5401.57 6223.43,5401.57 CB_P3.2
NetCN3_1: CN3.1 R8.1 | length 90.9
  Top Layer w20: CN3.1 R8.1
NetCN3_2: CN3.2 R9.1 | length 95.5
  Top Layer w6: CN3.2 R9.1
NetCN3_4: CN3.4 R11.1 | length 95.5
  Top Layer w6: CN3.4 R11.1
NetCN3_5: CN3.5 R12.1 | length 95.5
  Top Layer w6: CN3.5 R12.1
NetCN3_6: CN3.6 R13.1 | length 90.9
  Top Layer w6: CN3.6 R13.1
NetDB_P1_1: DB_P1.1 RB_P1.2 | length 110.5
  Top Layer w20: RB_P1.2 DB_P1.1
NetDB_P2_1: DB_P2.1 RB_P2.2 | length 110.5
  Top Layer w20: RB_P2.2 DB_P2.1
NetDB_P3_1: DB_P3.1 RB_P3.2 | length 110.5
  Top Layer w20: RB_P3.2 DB_P3.1
NetF1_P1_3: F1_P1.3 F1_P1.4
  other v3: 7600,2900
NetF1_P2_3: F1_P2.3 F1_P2.4
  other v3: 7600,4300
NetF1_P3_3: F1_P3.3 F1_P3.4
  other v3: 7600,5700
NetL3V3_1: L3V3.1 R7.1 | length 75
  Top Layer w6: L3V3.1 R7.1
NetQH_P1_2: QH_P1.2 RH_P1.2 | length 95.5
  Top Layer w20: RH_P1.2 QH_P1.2
NetQH_P2_2: QH_P2.2 RH_P2.2 | length 95.5
  Top Layer w20: RH_P2.2 QH_P2.2
NetQH_P3_2: QH_P3.2 RH_P3.2 | length 95.5
  Top Layer w20: RH_P3.2 QH_P3.2
NetQL_P1_2: QL_P1.2 RL1_P1.2 | length 95.5
  Top Layer w20: RL1_P1.2 QL_P1.2
NetQL_P2_2: QL_P2.2 RL1_P2.2 | length 95.5
  Top Layer w20: RL1_P2.2 QL_P2.2
NetQL_P3_2: QL_P3.2 RL1_P3.2 | length 95.5
  Top Layer w20: RL1_P3.2 QL_P3.2
NetRV1_P1_1: RV1_P1.1 RV2_P1.2 U2_P1.3 | length 415.6
  Top Layer w6: U2_P1.3 6575,3125 6625,3075 RV2_P1.2 6775,3075 6850,3000 RV1_P1.1 RV1_P1.1@6850,2925
NetRV1_P2_1: RV1_P2.1 RV2_P2.2 U2_P2.3 | length 411
  Top Layer w6: U2_P2.3 6575,4525 6625,4475 RV2_P2.2 6775,4475 6850,4400 RV1_P2.1
NetRV1_P3_1: RV1_P3.1 RV2_P3.2 U2_P3.3 | length 411
  Top Layer w6: U2_P3.3 6575,5925 6625,5875 RV2_P3.2 6775,5875 6850,5800 RV1_P3.1
NRST: B1.2 B1.3 C7.2 R12.2 U2.7 | length 695.8
  Top Layer w6: R12.2 4215,2275 4290,2350 v1(4315,2350) ; v1(4365,2350) 4375,2350 B1.3@4462.5,2437.5 ; B1.3@4485,2455 4485,2539.53 4547.74,2602.26 4547.74,2604.82 4545.47,2607.09 U2.7
  Bottom Layer w6: 4295,2350 v1(4315,2350) v1(4365,2350) v1@4370,2350
ON_SWITCH: J1.5 P2.31 P2.32 U2.54 | length 3276.4
  Top Layer w6: J1.5 5225,4525.39 P2.31 ; U2.54 4349.31,3049.9 4377.51,3049.9 4395,3067.39 4395,3570 P2.32
  Bottom Layer w6: P2.32 P2.31
PB3: R13.2 U2.55 | length 1008.3
  Top Layer w6: R13.2 4200,2185 4340,2325 v1(4340,2640) ; v1(4340,2790) 4440,2890 4440,2966.35 4377.51,3028.84 4349.31,3028.84 U2.55
  Bottom Layer w6: v1(4340,2640) v1(4340,2790)
PF6: C9.2 U2.47 | length 102.3
  Top Layer w6: U2.47 4450,3229.33 C9.2
TCK: R9.2 U2.49 | length 685.6
  Top Layer w6: R9.2 4204.53,2578.94 4229.95,2604.36 4230.36,2604.36 4245,2619 v1(4245,2640) ; v1(4245,2710) 4210,2745 4210,3050 4307.64,3147.64 U2.49
  Bottom Layer w6: v1(4245,2640) v1(4245,2710)
THROTTLE: J1.8 P2.7 P2.8 U2.22 | length 3206.1
  Top Layer w6: J1.8 4275,5325 5170,4430 5170,3100 ; U2.22 4975.79,2950.79 P2.8 5170,3100 ; P2.7 5170,3100
TMS: R11.2 U2.46 | length 960
  Top Layer w6: R11.2 4204.53,2378.94 4300,2474.41 v1(4300,2640) ; v1(4300,2710) 4466.73,2876.73 U2.46
  Bottom Layer w6: v1(4300,2640) v1(4300,2710)
USART_RX: J1.9 P2.29 P2.30 U2.43 | length 3321.4
  Top Layer w6: J1.9 4150,5470 4226.49,5546.49 4318.51,5546.49 5275,4590 5275,4250 P2.29 ; U2.43 4525.79,3600.79 P2.30
  Bottom Layer w6: P2.30 P2.29
USART_TX: J1.4 P2.27 P2.28 U2.42 | length 2892.2
  Top Layer w6: J1.4 5182,4459.34 5182,4143 P2.27 ; U2.42 4545.47,3520.47 P2.28
  Bottom Layer w6: P2.28 P2.27
V_SENSE1: P2.1 P2.2 U2.14 U2_P1.1 U2_P1.2 | length 2128.8
  Top Layer w6: U2.14 4683.95,2772.94 4683.95,2731.05 4720,2695 5020,2695 P2.2 P2.1 5275,2850 5375,2850 5450,2925 v1(5540,2925) ; v1(5745,2925) 6340,2925 6475,3060 U2_P1.1 U2_P1.2
  Bottom Layer w6: v1(5540,2925) v1(5745,2925)
V_SENSE2: P2.3 P2.4 U2.15 U2_P2.1 U2_P2.2 | length 3329.8
  Top Layer w6: U2.15 4703.64,2772.94 4703.64,2744.74 4723.38,2725 4950,2725 P2.4 P2.3 5275,2950 5375,2950 5500,3075 5500,3690 5550,3740 5550,4275 v1(5590,4315) ; v1(5750,4315) 5755,4320 6335,4320 6475,4460 U2_P2.1 U2_P2.2
  Bottom Layer w6: v1(5590,4315) v1(5750,4315)
V_SENSE3: P2.5 P2.6 U2.16 U2_P3.1 U2_P3.2 | length 4506.9
  Top Layer w6: U2.16 4898.62,2773.62 P2.6 P2.5 5230,3000 5276.27,3046.27 5376.27,3046.27 5475,3145 5475,3705 5525,3755 5525,4315 5590,4380 5590,4390 v1(5590,5560) ; v1(5695,5665) 5750,5720 6335,5720 6475,5860 U2_P3.1 U2_P3.2
  Bottom Layer w6: v1(5590,5560) v1(5695,5665)
VDD: C8.2 C14.2 C15.2 CU2_1_P1.1 CU2_1_P2.1 CU2_1_P3.1 CU2_2_P1.1 CU2_2_P2.1 CU2_2_P3.1 L1.1 R6.1 R8.2 U2.1 U2.32 U2.64 U2_P1.8 U2_P2.8 U2_P3.8 | length 10374.6
  Top Layer w10: 4270,2675 4273,2678 4273,2761.18 4348.62,2836.81 4348.62,2851.05 U2.64@4349.94,2851.05 ; C8.2 4426.05,2603.61 U2.1@4426.05,2773.62 ; U2.1 4428.96,2775.22 4428.96,2808.96 4768.95,3148.95 U2.32@4801.38,3148.95
  Top Layer w20: C8.2 4425,2675 4270,2675 R8.2 4200,2660 4165.47,2625.47 4020.47,2625.47 3990,2595 3990,2140 4010,2120 4225,2120 4330,2225 4700,2225 R6.1@4704.23,2229.23 ; R6.1 4703.94,2229.53 4867.32,2392.91 4867.91,2392.91 4867.91,2450 ; L1.1 4840.47,2604.53 4867.91,2577.09 4867.91,2450 ; v1(5750,3200) 6350,3200 6400,3250 CU2_1_P1.1 CU2_2_P1.1 6472.2,3375 6475,3372.2 U2_P1.8 ; v1(5750,4600) 6350,4600 6400,4650 CU2_1_P2.1 CU2_2_P2.1 6472.2,4775 6475,4772.2 U2_P2.8 ; U2_P3.8 6475,6172.2 6472.2,6175 CU2_2_P3.1 CU2_1_P3.1 6400,5825 6325,5750 5725,5750 5660,5685 5660,4600.16 5660,3200.16 5660,2510 5600,2450 4867.91,2450
  Bottom Layer w20: v1(5660,3200) v1(5750,3200) ; v1(5660,4600) v1(5750,4600)
pads on no net: U2.2 U2.3 U2.4 U2.5 U2.6 U2.8 U2.9 U2.10 U2.11 U2.17 U2.18 U2.19 U2.20 U2.21 U2.24 U2.25 U2.26 U2.27 U2.28 U2.29 U2.39 U2.40 U2.44 U2.45 U2.48 U2.50 U2.51 U2.52 U2.53 U2.56 U2.57 U2.58 U2.59 U2.61 U2.62 U2_P1.5 U2_P1.6 U2_P1.7 U2_P2.5 U2_P2.6 U2_P2.7 U2_P3.5 U2_P3.6 U2_P3.7
copper on no net:
  other v4: 3975,1150 3975,6125 7075,6125

## Polygon pours and split planes (outlines as drawn)
no net on Top Layer "Top Layer-No Net" (solid, pour order 4): 2075,3675
no net on Top Layer "Top Layer-No Net 1" (solid, pour order 2): 2260,3750
GND on Bottom Layer (solid, pour order 22): 3825,1000 7850,1000 7850,6275 3825,6275

## Other copper
Top Layer:
  region net NetC2_1: 4385,4290 4385,4255 4395,4245 4485,4245 4496.65,4233.35 4496.65,4166.65 4415,4085 4135,4085 4135,4210 4340,4210 4365,4235 4365,4290
  region net 120V: 6999.99,4870 7250,4870 7250,5075 7085,5240 6999.99,5240
  region net NetF1_P1_3: 7280,2560 7280,2880 7500,3100 7800,3100 7800,2520 7320,2520
  region net NetF1_P2_3: 7280,3960 7280,4280 7500,4500 7800,4500 7800,3920 7320,3920
  region net NetF1_P3_3: 7280,5360 7280,5680 7500,5900 7800,5900 7800,5320 7320,5320
  region net 120V: 7175,2070 7175,1050 5610,1050 5610,1625 6725,1625 6725,2070
  region net 120V: 7170,2070 7250,2150 7250,4870 7000,4870 7000,2070
  region net 120V: 6380,2360 6460,2440 7000,2440 7000,2070 6380,2070
  region net NetCB_P1_1: 6640,2770 6935,2770 6970,2735 6970,2550 6940,2520 6640,2520
  region net GND: 6220,2280 6130,2280 6100,2250 6100,2100 6130,2070 6220,2070
  region net GND: 6510,2845 6510,3005 6670,3005 6735,2940 6735,2845
  region net NetCB_P1_1: 6510,2520 6510,2605 6490,2625 6460,2625 6460,2770 6640,2770 6640,2520
  region net NetCB_P2_1: 6640,4170 6935,4170 6970,4135 6970,3950 6940,3920 6640,3920
  region net GND: 6510,4245 6510,4405 6670,4405 6735,4340 6735,4245
  region net NetCB_P2_1: 6510,3920 6510,4005 6490,4025 6460,4025 6460,4170 6640,4170 6640,3920
  region net 120V: 6380,3760 6460,3840 7000,3840 7000,3470 6380,3470
  region net GND: 6220,3680 6130,3680 6100,3650 6100,3500 6130,3470 6220,3470
  region net NetCB_P3_1: 6640,5570 6935,5570 6970,5535 6970,5350 6940,5320 6640,5320
  region net NetCB_P3_1: 6510,5320 6510,5405 6490,5425 6460,5425 6460,5570 6640,5570 6640,5320
  region net 120V: 6380,5160 6460,5240 6999.99,5240 6999.99,4870 6380,4870
  region net GND: 6510,5645 6510,5805 6670,5805 6735,5740 6735,5645
  region net GND: 6220,5080 6130,5080 6100,5050 6100,4900 6130,4870 6220,4870
  region: 6220,5080
  region: 6220,5080
Bottom Layer:
  pour cut-out: 5610,1500 5720,1500 5720,1595 5610,1595
  pour cut-out: 6725,1050 7175,1050 7175,2300 6725,2300
  pour cut-out: 6275,1500 6385,1500 6385,1595 6275,1595
  pour cut-out: 7260,5305 7380,5305 7540,5465 7745,5465 7800,5520 7800,5900 7500,5900 7355,5755 7355,5640 7260,5545
  pour cut-out: 7260,3905 7380,3905 7540,4065 7745,4065 7800,4120 7800,4500 7500,4500 7355,4355 7355,4240 7260,4145
  pour cut-out: 6873,5306 6993,5306 6993,5546 6873,5546
  pour cut-out: 6873,3906 6993,3906 6993,4146 6873,4146
  pour cut-out: 6873,2506 6993,2506 6993,2746 6873,2746
  pour cut-out: 7260,2505 7380,2505 7540,2665 7745,2665 7800,2720 7800,3100 7500,3100 7355,2955 7355,2840 7260,2745
  pour cut-out: 4135,4085 4135,4210 4340,4210 4365,4235 4365,4290 4385,4290 4385,4255 4395,4245 4485,4245 4496.65,4233.35 4496.65,4166.65 4415,4085

## Silkscreen, mask and mechanical layers (free items; w line width, h text height)
Top Overlay:
  lines w10: 7275,2775 7275,2875 7500,3100 7800,3100 7800,2525 7450,2525 ; 7275,4175 7275,4275 7500,4500 7800,4500 7800,3925 7450,3925 ; 7275,5575 7275,5675 7500,5900 7800,5900 7800,5325 7625,5325 7450,5325 ; 6725,1050 6950,1050 7175,1050 7175,2300 6725,2300 6725,1050 ; 7350,1050 7800,1050 7800,2300 7350,2300 7350,1050
  text "PHASE W" at 7400,5925 h30
  text "A" at 4640,5325 h600
  text "PHASE V" at 7375,4525 h30
  text "OUTPUT_ON" at 4800,4275 h30
  text "USART_RX" at 4829.99,4175 h30
  text "USART_TX" at 4829.99,4075 h30
  text "U_HIGH" at 4894.97,3975 h30
  text "V_HIGH" at 4894.97,3875 h30
  text "V_LOW" at 4919.96,3775 h30
  text "W_LOW" at 4919.96,3675 h30
  text "W_HIGH" at 4894.97,3575 h30
  text "V_HALL" at 4889.97,3475 h30
  text "U_HALL" at 4889.97,3375 h30
  text "W_HALL" at 4889.97,3275 h30
  text "U_LOW" at 4919.96,3175 h30
  text "PHASE U" at 7400,3125 h30
  text "THROT" at 4919.96,3075 h30
  text "W_VOLT" at 4889.97,2975 h30
  text "V_VOLT" at 4889.97,2875 h30
  text "U_VOLT" at 4889.97,2775 h30
  text "VDD" at 3900,2650 h30
  text "TCK" at 3900,2550 h30
  text "GND" at 3900,2450 h30
  text "TMS" at 3900,2350 h30
  text "+VBatt" at 6775,2325 h30
  text "GND" at 7500,2325 h30
  text "NRST" at 3875,2250 h30
  text "PB3" at 3900,2150 h30
  text "'.Pcb_File_Name_No_Path'" at 4100,1250 h60
  text "REVISION 2" at 4675,1115 h60
  text "TRANT IS GAY" at 4080,1065 h30
Bottom Overlay:
  text "ON_SWITCH" at 4585,5470 h30
  text "USART_RX" at 4085,5420 h30
  text "USART_TX" at 4560.01,5365 h30
  text "THROT" at 4085,5310 h30
  text "GND" at 4410,5255 h30
  text "GND" at 4085,5205 h30
  text "GND" at 4410,5145 h30
  text "24V" at 4085,5090 h30
  text "24V" at 4410.06,5035 h30
Mechanical 1:
  the board outline again, w10

## Text inside footprints (layer, text, board x,y; h text height)
C1: Top Overlay "+" at 4165,4460 h30 r180
C4: Top Overlay "+" at 4165,3635 h30 r180
C5: Top Overlay "+" at 5695,1430 h30 r90
C6: Top Overlay "+" at 6360,1430 h30 r90